# Altium PCB PCB_HidroExtra_v1.0.PcbDoc
Units mil, origin at the board's own origin, x right, y up, seen from the top; angles counter-clockwise.
Board outline 3149.61 x 3937.01 mil, 2 copper layers (Top Layer, Bottom Layer); 78 components, 48 nets, 219 pads, 14 vias.
Unrouted connection lines stored in the file: 1.
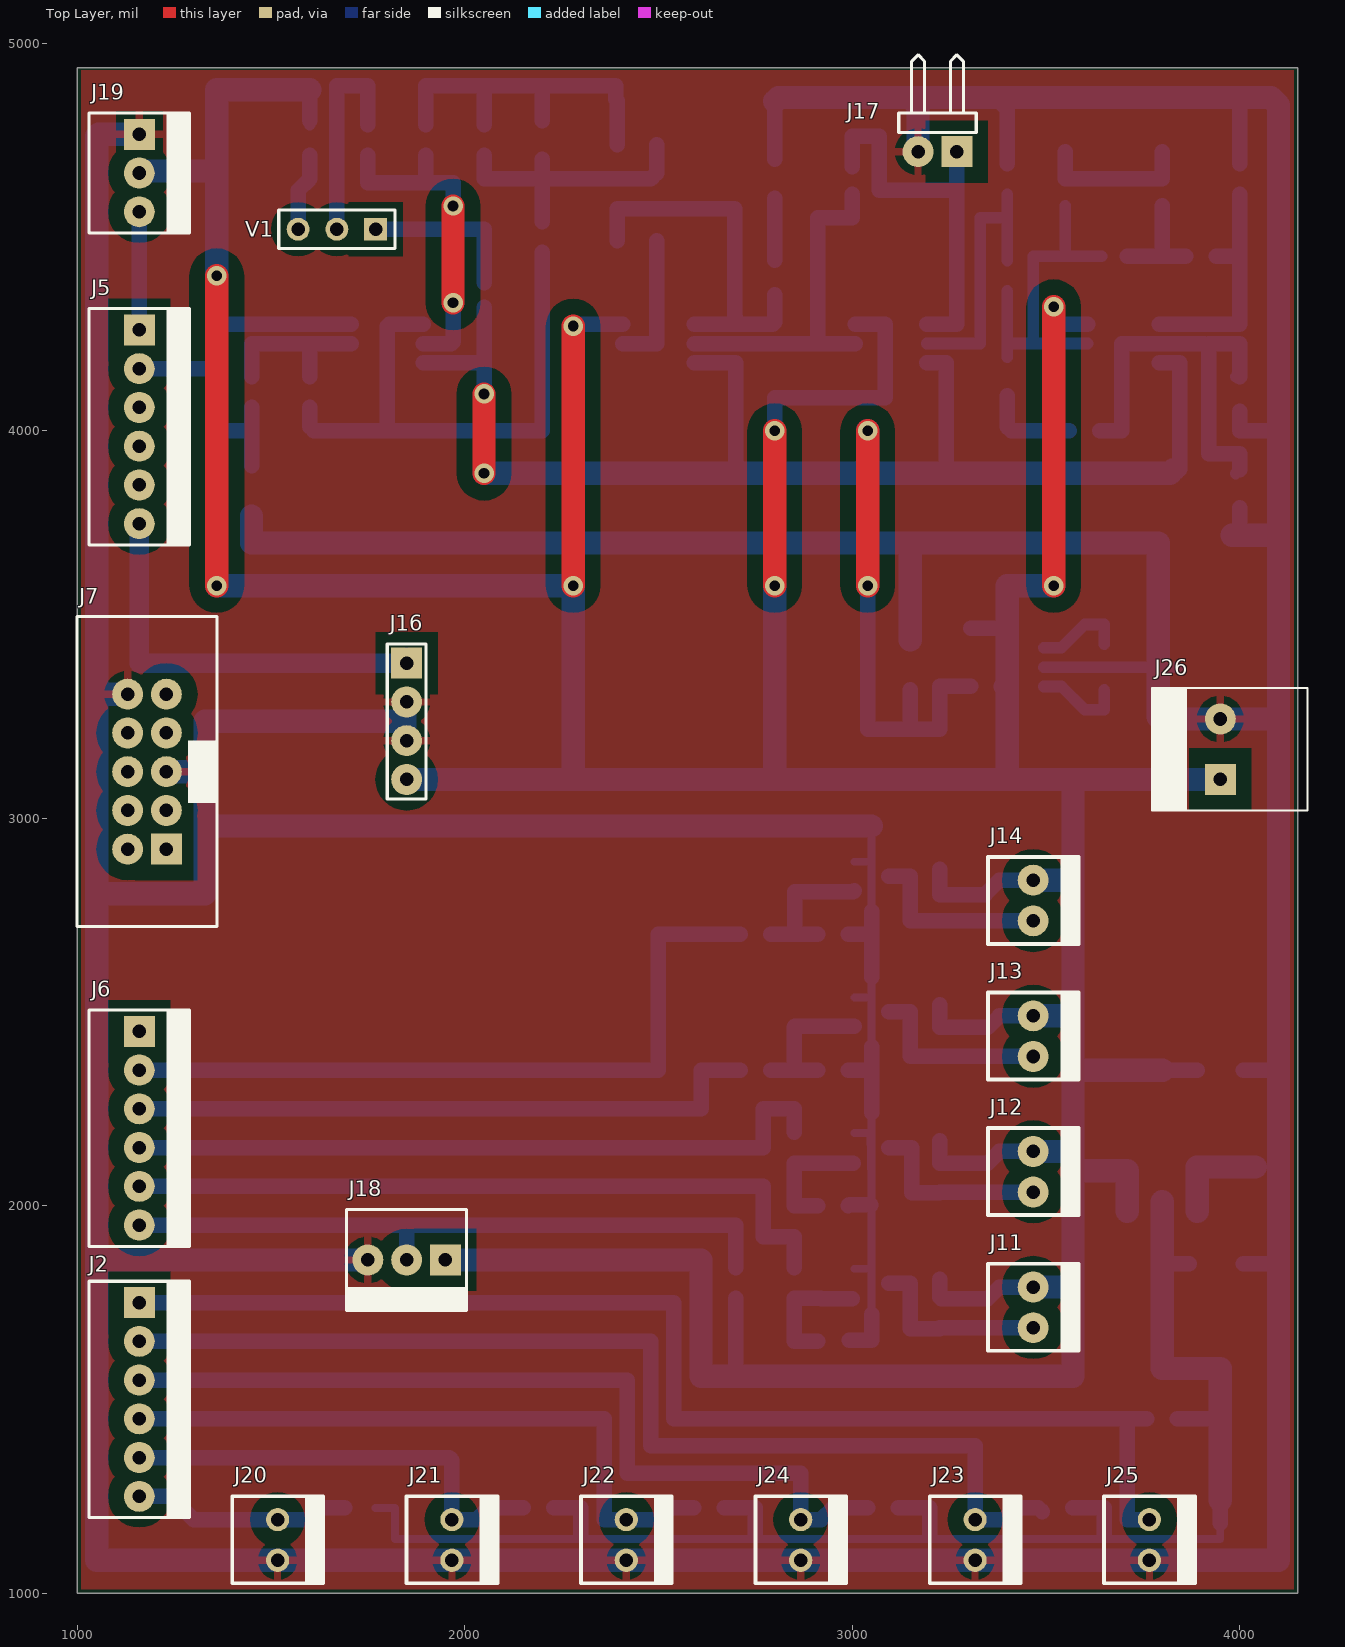
[diagram p0: Top Layer view]
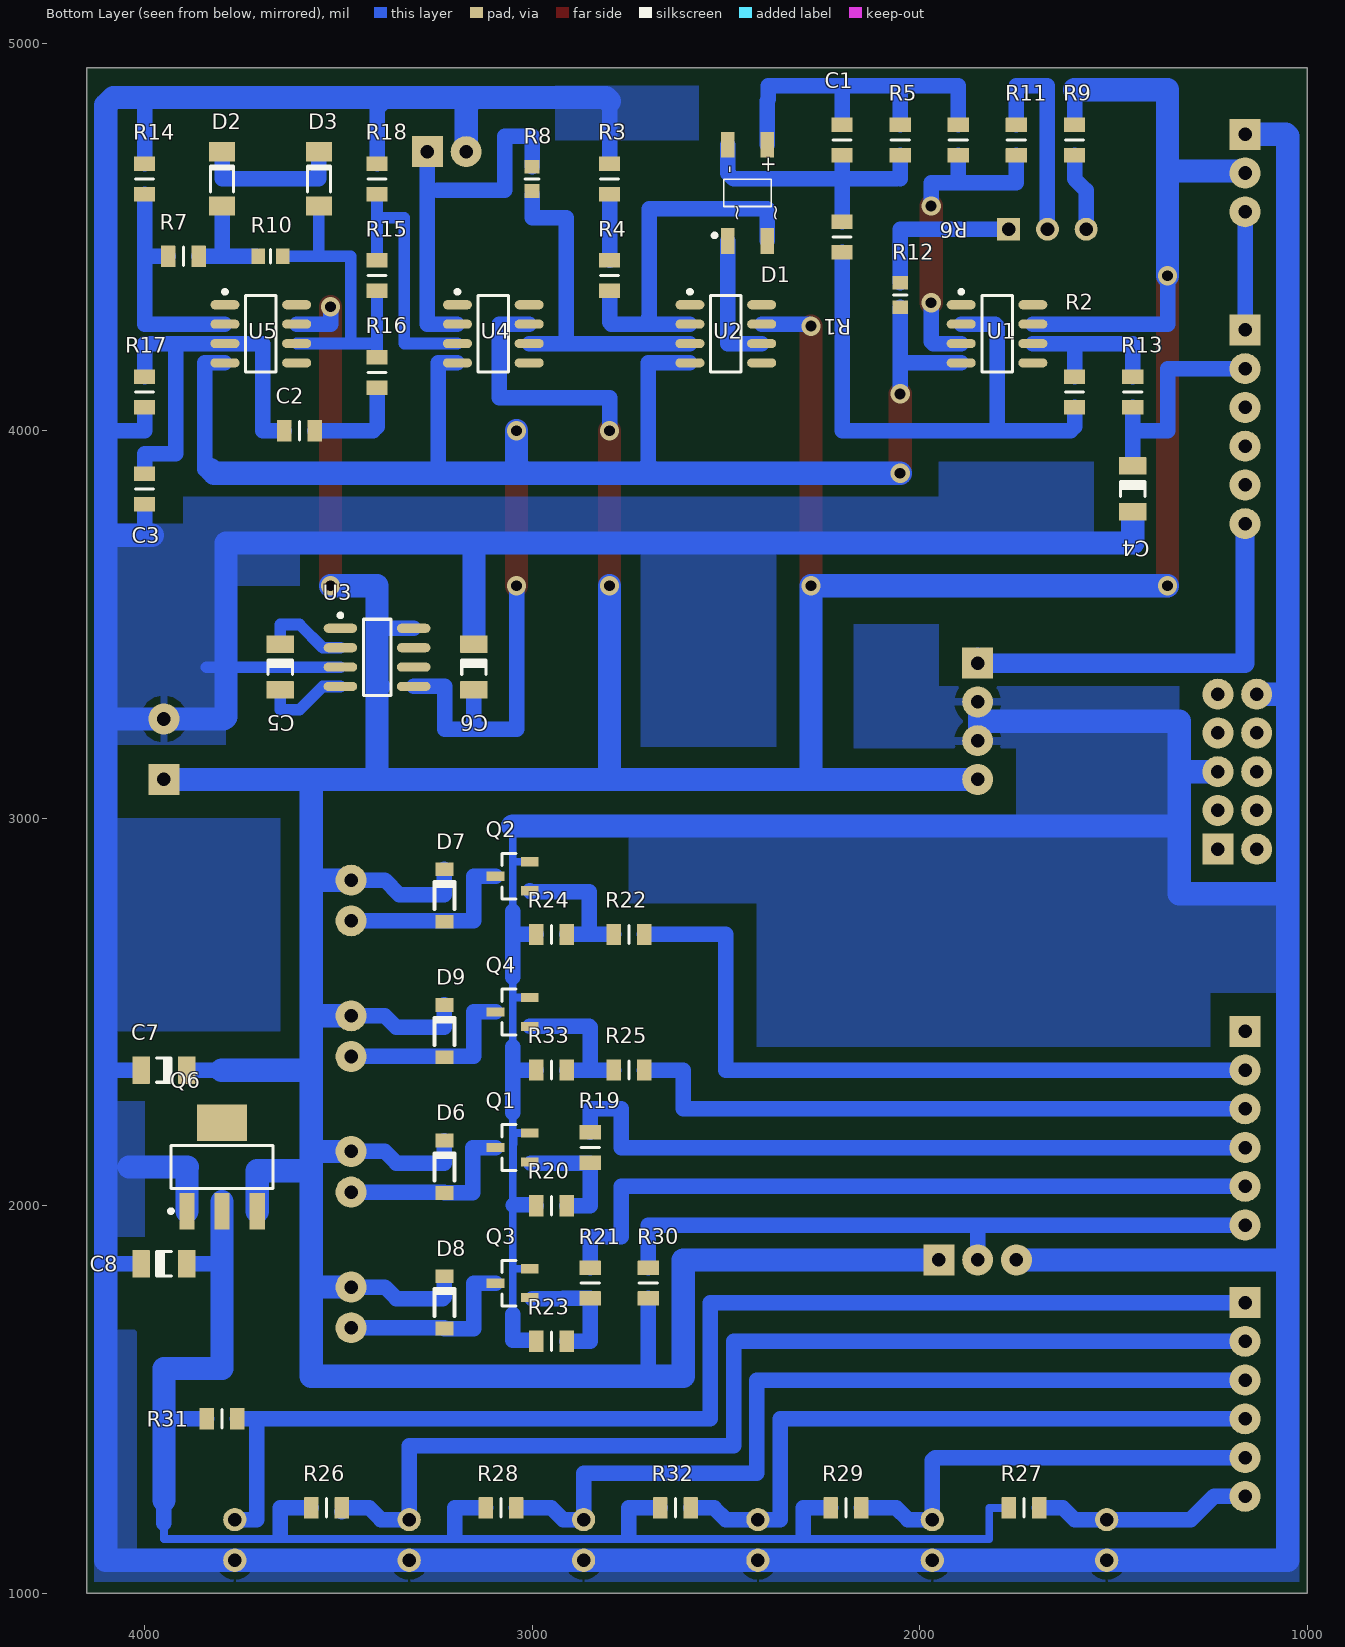
[diagram p1: Bottom Layer view, seen from below]
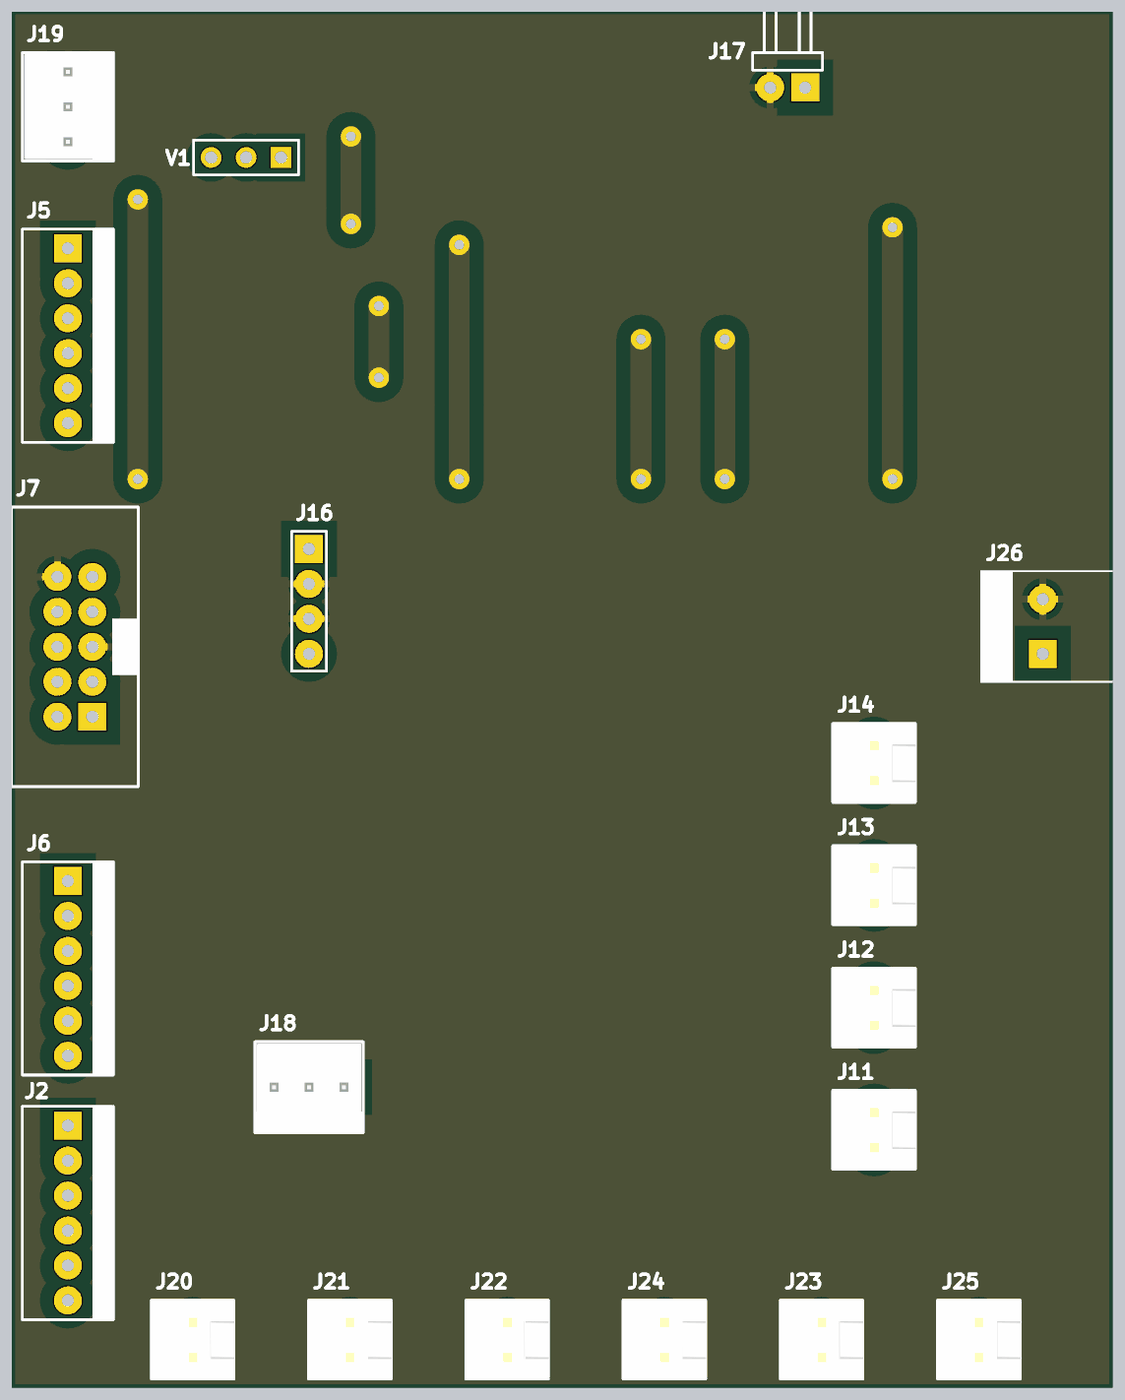
[diagram p2: 3D render of the assembled board from above, using the file's embedded part models]

## Layer stack, top to bottom
Top Solder: solder mask 0.4, Solder Resist, Dk 3.5
Top Layer: signal copper 1.4
Dielectric 1: dielectric 12.6, FR-4, Dk 4.8
Bottom Layer: signal copper 1.4
Bottom Solder: solder mask 0.4, Solder Resist, Dk 3.5

## Board outline
1000,1000 1000,4937.01 4149.61,4937.01 4149.61,1000

## Design rules (kind name [scope] priority, off if disabled: settings)
Clearance TopPoligonoClerance [InNamedPolygon('Top Layer-GND')] p1: gap=40 ignorepadtopadclearanceinfootprint=FALSE
Clearance [All] p2: gap=10 ignorepadtopadclearanceinfootprint=FALSE except(0: Arc-Hole Track-Hole SMDPad-Hole THPad-Hole Via-Hole Fill-Hole Poly-Hole Region-Hole Text-Hole)
PlaneClearance [All] p1: clearance=40
PlaneConnect [All] p1: planeconnectstyle=Relief reliefexpansion=20 reliefentries=4 reliefconductorwidth=10 reliefairgap=20
PolygonConnect [All] p1: thpad.connectstyle=Relief thpad.reliefconductorwidth=20 thpad.reliefentries=4 thpad.polygonreliefangle="90 Angle" thpad.airgapwidth=20 smdpad.connectstyle=Relief smdpad.reliefconductorwidth=10 smdpad.reliefentries=4 smdpad.polygonreliefangle="90 Angle" smdpad.airgapwidth=20 via.connectstyle=Relief via.reliefconductorwidth=10 via.reliefentries=4 via.polygonreliefangle="90 Angle" via.airgapwidth=20
RoutingVias [All] p1: holewidth=28 width=50 viastyle="Through Hole" minholewidth=28 minwidth=50 maxholewidth=28 maxwidth=50
SolderMaskExpansion [All] p1: expansion=4
Width [All] p1: maxlimit=80 minlimit=10 preferedwidth=30
28 further rules are at their usual default settings.

## Classes and differential pairs
component class pump: D6 D7 D8 D9 Q1 Q2 Q3 Q4 R19 R20 R21 R22 R23 R24 R25 R33
component class connectors: C7 C8 J2 J5 J6 J7 J11 J12 J13 J14 J16 J17 J18 J19 J20 J21 J22 J23 J24 J25 J26 Q6 R26 R27 R28 R29 R30 R31 R32
component class adc: C1 C2 C3 C4 C5 C6 D1 D2 D3 R1 R2 R3 R4 R5 R6 R7 R8 R9 R10 R11 R12 R13 R14 R15 R16 R17 R18 U1 U2 U3 U4 U5 V1

## Components (designator, comment, footprint, x,y, rotation, side; value= is the part's Value field where it differs from the comment)
C1 "0.22uF" 0805 2200,4750 r90 bottom
C2 "10nF" 0805 3600,4000 r180 bottom
C3 "Cap" 0805 4000,3850 r270 bottom value=10nF
C4 "Cap" CAPC3216x130N 1450,3850 r270 bottom value=10uF
C5 "10uF" CAPC3216x130N 3650,3390 r270 bottom
C6 "10uF" CAPC3216x130N 3150,3390 r270 bottom
C7 "10uF" CAPC3216x130N 3950,2350 r0 bottom
C8 "10uF" CAPC3216x130N 3950,1850 r180 bottom
D1 "Bridge" BRIDGE_TO-269AA 2444,4614 r90 bottom
D2 "BZV55-C3V3" SOD80C 3800,4650 r90 bottom
D3 "BZV55-C3V3" SOD80C 3550,4650 r90 bottom
D6 "" SOD123 3252,2100 r90 bottom
D7 "" SOD123 3252,2800 r90 bottom
D8 "" SOD123 3252,1750 r90 bottom
D9 "" SOD123 3252,2450 r90 bottom
J2 "Entrada Digitales" MOLEX6 1160,1750 r270 top
J5 "Entradas Analógicas" MOLEX6 1160,4260 r270 top
J6 "Entrdas Digitales" MOLEX6 1160,2450 r270 top
J7 "Conector 5x2" CONN_5x2_BOX 1180,3120 r90 top
J11 "Pump 1" MOLEX2#1 3350,1850 r270 top
J12 "Pump 2" MOLEX2#1 3350,2200 r270 top
J13 "Pump 3" MOLEX2#1 3350,2550 r270 top
J14 "Pump 4" MOLEX2#1 3350,2900 r270 top
J16 "Sensor de PH" HDR1X4 1850,3400 r270 top
J17 "Sonda EC" HDR1X2H 3270,4720 r180 top
J18 "DHT11" MOLEX3 1950,1860 r180 top
J19 "LM35" MOLEX3 1160,4765 r270 top
J20 "Nivel 1" MOLEX2#2 1400,1250 r270 top
J21 "Nivel 1.2" MOLEX2#2 1850,1250 r270 top
J22 "Nivel 2" MOLEX2#2 2300,1250 r270 top
J23 "Nivel 3" MOLEX2#2 3200,1250 r270 top
J24 "Nivel 4" MOLEX2#2 2750,1250 r270 top
J25 "Nivel 5" MOLEX2#2 3650,1250 r270 top
J26 "Fuente" CON_2_156 3950,3100 r90 top
Q1 "BSS138" SOT23_N_123 3050,2150 r0 bottom value="6 Ohm Rdson"
Q2 "BSS138" SOT23_N_123 3050,2850 r0 bottom value="6 Ohm Rdson"
Q3 "BSS138" SOT23_N_123 3050,1800 r0 bottom value="6 Ohm Rdson"
Q4 "BSS138" SOT23_N_123 3050,2500 r0 bottom value="6 Ohm Rdson"
Q6 "LD1117" SOT223_N 3800,2100 r90 bottom
R1 "220K" 0805 2200,4500 r270 bottom
R2 "220K" 0805 1600,4100 r90 bottom
R3 "2.2K" 0805 2800,4650 r270 bottom
R4 "1.0K" 0805 2800,4400 r270 bottom
R5 "22K" 0805 2050,4750 r270 bottom
R6 "220K" 0805 1900,4750 r270 bottom
R7 "33K" 0805 3900,4450 r180 bottom
R8 "6.8K" 0603 3000,4650 r270 bottom
R9 "100K" 0805 1600,4750 r90 bottom
R10 "56K" 0603 3675,4450 r180 bottom
R11 "100K" 0805 1750,4750 r270 bottom
R12 "82K" 0603 2050,4350 r90 bottom
R13 "4.7K" 0805 1450,4100 r90 bottom
R14 "33K" 0805 4000,4650 r270 bottom
R15 "100K" 0805 3400,4400 r90 bottom
R16 "1.0K" 0805 3400,4150 r90 bottom
R17 "1.0K" 0805 4000,4100 r270 bottom
R18 "1.0K" 0805 3400,4650 r90 bottom
R19 "100" 0805 2850,2150 r270 bottom
R20 "10K" 0805 2950,2000 r180 bottom
R21 "100" 0805 2850,1800 r270 bottom
R22 "100" 0805 2750,2700 r0 bottom
R23 "10K" 0805 2950,1650 r180 bottom
R24 "10K" 0805 2950,2700 r180 bottom
R25 "100" 0805 2750,2350 r0 bottom
R26 "10K" 0805 3530,1220 r0 bottom
R27 "10K" 0805 1730,1220 r0 bottom
R28 "10K" 0805 3080,1220 r0 bottom
R29 "10K" 0805 2190,1220 r0 bottom
R30 "10K" 0805 2700,1800 r270 bottom
R31 "10K" 0805 3800,1450 r0 bottom
R32 "10K" 0805 2630,1220 r0 bottom
R33 "10K" 0805 2950,2350 r180 bottom
U1 "TL071" SO8_L 1800,4250 r180 bottom
U2 "TL071" SO8_L 2500,4250 r180 bottom
U3 "ICL7660" SO8_N 3400,3415 r180 bottom
U4 "TL071" SO8_L 3100,4250 r180 bottom
U5 "TL071" SO8_L 3700,4250 r180 bottom
V1 "22K" HDR1X3 1770,4520 r180 top

## Footprints (in the part's own frame and the unit in brackets; to place one, negate y for a bottom-side part, rotate by r counter-clockwise, add the part's x,y. Pads: shape width x height; smd on the part's side, far side on the other; paste and mask are expansions set on the pad)
0603 [mm]
  rrect5% 0.9x1 smd mask+0.051: 1(-0.8,0) 2(0.8,0)
  silkscreen extent 0,-0.45 0,0.45, body extent -0.85,-0.48 0.85,0.48, height 0.25
0805 [mm]
  rrect5% 0.95x1.4 smd: 1(-1,0) 2(1,0)
  silkscreen extent 0,-0.6 0,0.6, body extent -1.07,-0.7 1.07,0.7, height 0.6
BRIDGE_TO-269AA [mil]
  rect 66.93x35.43 smd: 1(124,-51) 2(-124,-51) 3(124,51) 4(-124,51)
  silkscreen extent -115,-61 35,90, body extent -139,-97 139,97, height 106
CAPC3216x130N [mm] "Chip Capacitor, Body 3.2x1.6mm, IPC Medium Density"
  rrect5% 1.15x1.8 smd: 1(-1.5,0) 2(1.5,0)
  silkscreen extent -0.48,-0.8 0.5,0.8, body extent -1.7,-0.9 1.7,0.9, height 1.3
CON_2_156 [mil] "Connector, 0.156\", 2 vias"
  rect 80x80 hole 35: 1(0,0)
  round 80 hole 35: 2(156,0)
  silkscreen extent -80,-225 236,177
CONN_5x2_BOX [mil] "Connector; IDC, Straight Press-in Pin, Thru-Hole; 10 Position; Vertical; Pitch 2.54 mm; Body 20.32 x 9.2 x 9.45 mm (LxWxH)"
  rect 80x80 hole 35: 1(-200,-50)
  round 80 hole 35: 2(-200,50) 3(-100,-50) 4(-100,50) 5(0,-50) 6(0,50) 7(100,-50) 8(100,50) 9(200,-50) 10(200,50)
  silkscreen extent -400,-181 400,181
HDR1X2H [mil] "Connector; Header; 2 Position; Right Angle"
  rect 80x80 hole 35: 1(0,0)
  round 80 hole 35: 2(100,0)
  silkscreen extent -50,-250 150,-50
HDR1X3 [mm] "Connector; Header; 3 Position"
  rect 1.5x1.5 hole 0.9: 1(0,0)
  round 1.5 hole 0.9: 2(2.54,0) 3(5.08,0)
  silkscreen extent -1.27,-1.27 6.35,1.27
HDR1X4 [mil] "Connector; Header; 4 Position"
  rect 80x80 hole 35: 1(0,0)
  round 80 hole 35: 2(100,0) 3(200,0) 4(300,0)
  silkscreen extent -50,-50 350,50
MOLEX2#1 [mil]
  round 80 hole 35: 1(60,117) 2(165,117)
  silkscreen extent 0,0 224,234, body extent 0,0 226,236, height 465
MOLEX2#2 [mil]
  round 60 hole 35: 1(60,117) 2(165,117)
  silkscreen extent 0,0 224,234, body extent 0,0 226,236, height 465
MOLEX3 [mil]
  rect 80x80 hole 35: 1(0,0)
  round 80 hole 35: 2(100,0) 3(200,0)
  silkscreen extent -55,-130 255,130, body extent -50,-125 250,125, height 423
MOLEX6 [mil]
  rect 80x80 hole 35: 1(0,0)
  round 80 hole 35: 2(100,0) 3(200,0) 4(300,0) 5(400,0) 6(500,0)
  silkscreen extent -55,-130 555,130
SO8_L [mm] "SOIC, 8-Leads, Body 4.9x3.9mm, Pitch 1.27mm, IPC High Density"
  oval 1.9x0.6 smd: 1(-2.35,1.905) 2(-2.35,0.635) 3(-2.35,-0.635) 4(-2.35,-1.905) 5(2.35,-1.905) 6(2.35,-0.635) 7(2.35,0.635) 8(2.35,1.905)
  silkscreen extent -2.48,-2.5 1,2.88, body extent -2,-2.5 2,2.5, height 1.75
SO8_N [mm] "SOIC, 8-Leads, Body 4.9x3.9mm, Pitch 1.27mm, IPC Medium Density"
  oval 2.2x0.6 smd: 1(-2.4,1.905) 2(-2.4,0.635) 3(-2.4,-0.635) 4(-2.4,-1.905) 5(2.4,-1.905) 6(2.4,-0.635) 7(2.4,0.635) 8(2.4,1.905)
  silkscreen extent -2.53,-2.5 0.9,2.88, body extent -2,-2.5 2,2.5, height 1.75
SOD80C [mm] "Metal Electrode Face (MELF) Diode; Body 3.5 x 1.6 mm (LxDia)"
  rect 1.25x1.7 smd: 1(-1.775,0) 2(1.775,0)
  silkscreen extent -0.85,-0.75 0.85,0.75
SOD123 [mil]
  rect 35.43x47.24 smd: 1(-67,-26) 2(68,-26)
  silkscreen extent -35,-52 35,0, body extent -73,-57 73,5, height 50
SOT23_N_123 [mm] "SOT23, 3-Leads, Body 2.9x1.3mm, Pitch 0.95mm, Lead Span 2.3mm - Reverse Pinning, IPC Medium Density"
  rect 1.15x0.6 smd: 1(-1.125,0.95) 2(-1.125,-0.95) 3(1.125,0)
  silkscreen extent -0.2,-1.5 0.7,1.5, body extent -0.7,-1.5 0.7,1.5, height 1.1
SOT223_N [mm] "SOT223, 4-Leads, Body 6.5x3.5mm, Pitch 2.3mm, Lead Span 7mm, IPC Medium Density"
  rect 2.4x1 smd: 1(-2.9,2.3) 2(-2.9,0) 3(-2.9,-2.3)
  rect 2.4x3.3 smd: 4(2.9,0)
  silkscreen extent -3.02,-3.35 1.4,3.48, body extent -1.85,-3.35 1.85,3.35, height 1.7

## Part data
C1: library part Cap, "Cap", Package=0603, Tolerance=±10%, Voltage-Rated=50V
C2: library part Cap, "Cap", Package=0805, Tolerance=±10%, Voltage-Rated=50V
C3: Package=0805, Tolerance=±10%, Voltage-Rated=50V
C4: Package=0603, Tolerance=±10%, Voltage-Rated=50V
C5 C6: library part "Cap Pol", "Cap", Current="90 mARMS", Manufacturer=Panasonic, MfgPartNum=EEE-FC1H220P, Package="8mm dia.", Tolerance=±10%, Voltage-Rated=50V, 3rdMfgr="Vishay / MAL214097103E3"
C7 C8: library part Cap, "Cap", Package=0603, Tolerance=±10%, Voltage-Rated=6.3V
D1: "Full Wave Diode Bridge", DatasheetVersion=E2732B, LatestRevisionDate=29-May-2009, LatestRevisionNote="Sch pins A & K swapped.", PackageDescription="Bridge Rectifier; 4 Terminals; Body 9.4 x 9.4 mm (typ); Pitch 5.08 mm", PackageReference=D-38, Published=8-Jun-2000, Publisher="Altium Limited"
D2 D3: library part "D Zener", "Zener Diode 3.3v - SMD", LatestRevisionDate=17-Jul-2002, LatestRevisionNote="Re-released for DXP Platform.", PackageDescription="Diode, Thru-Hole; 2 Leads; 0.7 in Pin Spacing", PackageReference=DIODE-0.7, Published=8-Jun-2000, Publisher="Altium Limited"
D6 D7 D8 D9: library part MBRX160, "SOD123"
J2 J5 J6: library part MOLEX6
J11 J12 J13 J14 J20 J21 J22 J23 J24 J25 J26: library part "Header 2", "Header, 2-Pin", LatestRevisionDate=17-Jul-2002, LatestRevisionNote="Re-released for DXP Platform.", Publisher="Altium Limited"
J16: library part "Header 4", LatestRevisionDate=17-Jul-2002, LatestRevisionNote="Re-released for DXP Platform.", Publisher="Altium Limited"
J17: library part "Header 2H", "Header, 2-Pin, Right Angle", LatestRevisionDate=17-Jul-2002, LatestRevisionNote="Re-released for DXP Platform.", Publisher="Altium Limited"
J18 J19: library part MOLEX3
Q1 Q2 Q3 Q4: "N-Channel MOSFET", Manufacturer=Fairchild, Package=SOT23, Voltage-Rated=50V
Q6: "Voltage Reg., Low Drop", PackageDescription="3-Pin Transistor Outline Package 2.54 mm Pitch, 15.1 mm Lead Span", PackageReference=SOT-223
R1 R2 R3 R4 R5 R6 R7 R8 R9 R10 R11 R12 R13 R14 R15 R16 R17 R18 R19 R20 R21 R22 R23 R24 R25 R26 R27 R28 R29 R30 R31 R32 R33: library part Res, "Resistor", Package=0603, Tolerance=1%
U1 U2 U4 U5: "Low-noise jfet-input operational amplifiers"
U3: "CMOS Voltage Converters, from positive to negative for an input range of +1.5V to +10.0V"
V1: library part Preset, "Potentiometer", LatestRevisionDate=17-Jul-2002, LatestRevisionNote="Re-released for DXP Platform.", PackageDescription="Variable Resistor, Thru-Hole; 3 Leads", PackageReference=VR5, Published=8-Jun-2000, Publisher="Altium Limited", Set Position=0.5, Sim Note="Enter the Resistance value and the set point into parameter fields."

## Via types
v1: diameter 50, hole 28, Top Layer to Bottom Layer, 14 vias

## Nets (pads, with @x,y where several pads share a name; then routed paths per layer and width w, separated by ;. In a path a pad name is that pad's centre, name@x,y a point inside that pad or via, vN(x,y) a via of type N, cw(c..) or ccw(c..) an arc to the next point about the centre after c; other vN are vias at no path point)
+3.3v: C8.2 Q6.2 R26.2 R27.2 R28.2 R29.2 R31.2 R32.2 | length 4053.8
  Bottom Layer w20: R27.2 1820,1220 1820,1140 3950,1140 3950,1180
  Bottom Layer w40: R29.2 2300,1220 2300,1150 ; R32.2 2750,1220 2750,1150 ; R28.2 3200,1220 3200,1150 ; R26.2 3650,1220 3650,1150 ; 3800,1850 C8.2@3870,1850 ; R31.2 3950,1450 ; 3950,1180 3950,1240
  Bottom Layer w60: Q6.2@3800,2010 Q6.2 3800,1850 3800,1580 3950,1580 3950,1450 3950,1240
+5v: C7.1 D6.2 D7.2 D8.2 D9.2 J11.1 J12.1 J13.1 J14.1 J16.4 J18.1 J19.2 J26.1 Q6.3 R9.2 R30.2 U1.7 U2.7 U3.8 U4.7 U5.7 | length 15495.7
  Top Layer w60: v1(1360,3600) v1(1360,4400) ; v1(2280,3600) v1(2280,4270) ; v1(2800,3600) v1(2800,4000) ; v1(3520,3600) v1(3520,4320)
  Bottom Layer w30: R9.2 R9.2@1600,4790 ; v1(2280,4270) v1@2285,4275
  Bottom Layer w40: v1(1360,4400) 1360,4275 U1.7 ; R9.2@1600,4800 1600,4880 ; v1@2285,4275 U2.7 ; 2700,1590 R30.2 ; v1(2800,4000) 2800,4085 3085,4085 3085,4275 U4.7 ; D8.2@3226,1810 3226,1764 3230,1760 3350,1760 3380,1790 J11.1 ; D6.2 3226,2110 3350,2110 3380,2140 J12.1 ; D9.2 3226,2460 3350,2460 3380,2490 J13.1 ; D7.2 3226,2803 3343,2803 3380,2840 J14.1 ; U3.8 3400,3490 ; v1(3520,4320) 3520,4275 U5.7 ; 3570,2350 3570.55,2349.45 ; 3800.55,2349.45 3890.39,2349.45 C7.1
  Bottom Layer w50: 2800,3111.77 2805,3106.77 ; 3390,3340 3400,3330
  Bottom Layer w60: J19.2 1165,4670 1360,4670 ; v1(1360,3600) v1(2280,3600) 2280,3110 2290,3100 ; v1(1360,4400) 1360,4670 ; 1600,4880 1360,4880 1360,4670 ; J16.4@1870,3100 2290,3100 ; J18.1 2610,1860 2610,1560 3570,1560 3570,1790 ; 2800,3111.77 v1(2800,3600) ; 3400,3100 2290,3100 ; 3400,3130 3400,3330 ; 3400,3340 3400,3490 3400,3600 v1(3520,3600) ; 3410,3100 3570,3100 ; J11.1 3570,1790 ; J12.1 3570,2140 ; J13.1 3570,2490 ; J14.1 3570,2840 ; 3570.55,2349.45 3800.55,2349.45 ; Q6.3 3709.45,2090 3570,2090 ; J26.1 3570,3100 ; 3570,1790 3570,2090 ; 3570,2090 3570,2140 ; 3570,2140 3570,2350 3570,2490 ; 3570,2490 3570,2840 ; 3570,2840 3570,3100
-5v: C6.2 R12.1 U1.4 U2.4 U3.5 U4.4 U5.4 | length 4792
  Top Layer w60: v1(2050,3890) v1(2050,4095) ; v1(3040,3600) v1(3040,4000)
  Bottom Layer w40: U1.4 2045,4175 2050,4180 ; v1@2050,4100 2050,4180 ; R12.1 2050,4180 ; U2.4 2700,4175 2700,3900 2700,3890 ; v1(3040,3600) 3040,3230 3150,3230 ; C6.2 3150,3230 ; U4.4 3242.57,4175 3242.57,3890 ; U3.5 3225.51,3340 3225.51,3230 3150,3230 ; U5.4 3845,4175 3845,3900 3830,3900
  Bottom Layer w60: v1(2050,3890) 2690,3890 2700,3900 ; 2700,3890 3242.57,3890 3820,3890 3830,3900 ; 3030,3900 3040,3910 v1(3040,4000)
GND: C3.2 C4.2 C6.1 C7.2 C8.1 J7.5 J7.10 J16.2 J16.3 J17.2 J18.3 J19.1 J20.2 J21.2 J22.2 J23.2 J24.2 J25.2 J26.2 Q1.2 Q2.2 Q3.2 Q4.2 Q6.1 R3.1 R14.1 R17.2 R18.2 R20.1 R23.1 R24.1 R33.1 U3.3 | length 22883.2
  Bottom Layer w20: Q3.2 3047.4,1837.4 3050,1840 ; Q1.2 3047.4,2187.4 3050,2060 ; Q4.2 3047.4,2537.4 3050,2540 ; Q2.2 3047.4,2887.4 3050,2890 ; 3050,1720 3050,1840 ; 3050,2240 3050,2060 ; 3050,2410 3050,2540 ; 3050,2590 3050,2540 ; 3050,2760 3050,2890 ; 3050,2980 3050,2890 ; 3050,1840 3050,1890 3050,2060
  Bottom Layer w30: U3.3 3790,3390 3840,3390
  Bottom Layer w40: 1050,3325 1055,3320 ; R3.1@2800,4700 2800,4850 ; R20.1 2991.97,2002.6 3047.4,2002.6 3048.35,2001.65 ; R33.1 3048.35,2350 ; R24.1 3040,2700 ; R23.1@2991.97,1652.6 3050,1652.6 3050,1720 ; 3050,2240 3050,2410 ; 3050,2590 3050,2760 ; 3370,4860 3400,4830 R18.2 ; 3980,3730 4000,3750 C3.2@4000,3800.63 ; R17.2@4000,4050.63 4000,4000 4100,4000 ; R14.1 4000,4830 ; C8.1 4089.37,1850 ; C7.2 4100,2350
  Bottom Layer w50: 1830,3250 J16.2 J16.3 ; 4079.37,3730 4089.37,3740
  Bottom Layer w60: 1055,3320 J7.10 ; 1060,1855 1060,1860 J18.3 ; J19.1 1055,4765 1050,4760 1050,4665 1050,3325 1050,2805 ; J7.5 1330,3120 ; C4.2@1450,3780 1450,3710 3160,3710 ; 1830,3250 1330,3250 1330,3120 ; 2800,4850 2810,4860 3370,4860 4080,4860 4100,4840 4100,4200 4100,4000 4100,3750.63 4100,2350 4100,1085 J25.2 J23.2 J24.2 J22.2 J21.2 J20.2 1050,1085 1050,2805 ; 3050,2980 1330,2980 ; C6.1@3150,3460 3150,3700 3160,3710 ; 3160,4850 3170,4840 J17.2 ; Q6.1 3890.55,2099.45 3890,2100 4040,2100 ; 3980,3730 4079.37,3730 ; 4085.37,3256 J26.2 3796,3256 3790,3262 3790,3390 3790,3710 3160,3710 ; 1050,2805 1330,2805 1330,2980 ; 1330,2980 1330,3120
NetC1_1: C1.1 D1.3 R1.1 R5.2 | length 735.5
  Bottom Layer w40: 2050,4650 R5.2 ; 2060,4650 2200,4650 ; R1.1 2200,4650 ; C1.1@2200,4700 2200,4650 ; D1.3 2495,4665 2480,4650 2200,4650
NetC1_2: C1.2 D1.1 R5.1 R6.1 | length 914.5
  Bottom Layer w40: R6.1 1900,4890 2140,4890 2390,4890 2390,4855 2393,4852 D1.1 ; R5.1 2050,4880 ; C1.2@2200,4800 2200,4880
NetC2_1: C2.1 C3.1 R17.1 U5.3 | length 1095.2
  Bottom Layer w30: C3.1@3990,3889.37 C3.1@4000,3899.37 ; R17.1@3990,4139.37 R17.1@4000,4149.37
  Bottom Layer w40: C2.1 3695.32,4000 3695.32,4225 U5.3 3910,4225 ; C3.1@4000,3899.37 4000,3940 3920,3940 3920,4225 4000,4225 4000,4149.37 R17.1
NetC2_2: C2.2 R16.1 | length 244.8
  Bottom Layer w40: 3400,4090 3400,4010 3410,4000 C2.2
NetC4_1: C4.1 J5.2 R13.1 | length 672.2
  Bottom Layer w40: J5.2 1360,4160 1360,4000 1450,4000 ; C4.1 1450,4000 ; 1450,3990 1450,4000 ; 1450,4000 R13.1 1450,4000
NetC5_1: C5.1 U3.2 | length 231.3
  Bottom Layer w30: U3.2 3540,3440 3600,3500 3650,3500 C5.1
NetC5_2: C5.2 U3.4 | length 231.3
  Bottom Layer w30: U3.4 3540,3340 3600,3280 3650,3280 C5.2
NetD1_2: D1.2 R4.2 U2.2 | length 959.4
  Bottom Layer w40: D1.2 2393,4573 2697,4573 2697,4293 2700,4290 2700,4275 ; U2.2 2700,4275 ; 2795,4275 2700,4275 ; 2800,4280 R4.2@2800,4350.63
NetD1_4: D1.4 U2.6 | length 352.5
  Bottom Layer w40: U2.6 2495,4225 D1.4
NetD2_1: D2.1 R7.2 R10.1 | length 311.4
  Bottom Layer w30: 3830,4450 R7.2
  Bottom Layer w40: R10.1@3710,4450 R7.2 ; 3800,4450 D2.1
NetD2_2: D2.2 D3.2 | length 389.8
  Bottom Layer w40: D3.2 3550,4650 3800,4650 D2.2
NetD3_1: D3.1 R10.2 R15.1 R16.2 U5.6 | length 911.1
  Bottom Layer w30: R16.2 3400,4230 ; R15.1 3400,4230 ; 3467.5,4230 3467.5,4450 3540,4450 ; D3.1 3550,4460 3540,4450 ; U5.6 3405,4225 3400,4230 ; R10.2 3540,4450
NetD6_1: D6.1 J12.2 Q1.3 | length 489.7
  Bottom Layer w40: Q1.3 3153,2150 3153,2033 D6.1 ; D6.1@3226,2035 J12.2
NetD7_1: D7.1 J14.2 Q2.3 | length 487.7
  Bottom Layer w40: Q2.3 3150,2850 3150,2735 J14.2
NetD8_1: D8.1 J11.2 Q3.3 | length 489.7
  Bottom Layer w40: Q3.3 3150,1800 3150,1683 D8.1 ; D8.1@3226,1685 J11.2
NetD9_1: D9.1 J13.2 Q4.3 | length 487.7
  Bottom Layer w40: Q4.3 3150,2500 3150,2385 J13.2
NetJ2_1: J2.1 J25.1 R31.1 | length 3217.6
  Bottom Layer w40: J2.1 2540,1750 2540,1450 3710,1450 ; R31.1 3710,1450 ; J25.1 3710,1190 3710,1450
NetJ2_2: J2.2 J23.1 R26.1 | length 2807.2
  Bottom Layer w40: J2.2 2480,1650 2480,1380 3317,1380 J23.1 3390,1190 3420,1220 3480.63,1220 R26.1@3490.63,1210
NetJ2_3: J2.3 J24.1 R28.1 | length 2253.1
  Bottom Layer w40: J2.3 2420,1550 2420,1310 2867,1310 J24.1 2920,1190 2950,1220 R28.1
NetJ2_4: J2.4 J22.1 R32.1 | length 1703.1
  Bottom Layer w40: J2.4 2360,1450 2360,1190 J22.1 2500,1190 2530,1220 R32.1
NetJ2_5: J2.5 J21.1 R29.1 | length 1159
  Bottom Layer w40: J2.5 1960,1350 1967,1343 J21.1 2030,1190 2060,1220 R29.1
NetJ2_6: J2.6 J20.1 R27.1 | length 567.9
  Bottom Layer w40: J2.6 1240,1250 1300,1190 J20.1 1600,1190 1630,1220 R27.1
NetJ5_1: J5.1 J19.3 | length 305
  Bottom Layer w40: J5.1 J19.3
NetJ5_6: J5.6 J16.1 | length 1058.3
  Bottom Layer w40: J16.1@1830,3400 J16.1@1850,3420
  Bottom Layer w50: J5.6 1160,3400 J16.1@1830,3400
NetJ6_2: J6.2 R22.1 | length 1900.6
  Bottom Layer w40: J6.2 2500,2350 2500,2700 R22.1
NetJ6_3: J6.3 R25.1 | length 1650.6
  Bottom Layer w40: J6.3 2610,2250 2610,2350 R25.1
NetJ6_4: J6.4 R19.1 | length 1850.6
  Bottom Layer w40: J6.4 2770,2150 2770,2250 2850,2250 R19.1
NetJ6_5: J6.5 R21.1 | length 1900.6
  Bottom Layer w40: J6.5 2770,2050 2770,1920 2850,1920 R21.1
NetJ6_6: J6.6 J18.2 R30.1 | length 1740.6
  Bottom Layer w40: J6.6 1850,1950 ; J18.2 1850,1950 ; R30.1 2700,1950 1850,1950
NetJ17_1: J17.1 R8.1 U4.2 | length 986
  Bottom Layer w40: R8.1 3000,4760 3070,4760 3070,4620 3245,4620 ; U4.2 3270,4275 J17.1
NetQ1_1: Q1.1 R19.2 R20.2 | length 323.7
  Bottom Layer w40: R20.2 2850,2000 2850,2110 Q1.1@3003.11,2110
NetQ2_1: Q2.1 R22.2 R24.2 | length 386.9
  Bottom Layer w40: R22.2 2850,2700 ; R24.2 2850,2700 ; Q2.1 3003.11,2810 2851.97,2810 2851.97,2701.97 2850,2700
NetQ3_1: Q3.1 R21.2 R23.2 | length 321.5
  Bottom Layer w40: R23.2 2850,1650 R21.2 2919.37,1760.63 2920,1760 Q3.1@3000,1760
NetQ4_1: Q4.1 R25.2 R33.2 | length 388.4
  Bottom Layer w40: R25.2 2850,2350 ; R33.2 2850,2350 ; Q4.1 2851.97,2462.6 2850,2460.63 2850,2350
NetR1_2: R1.2 R2.1 U1.2 | length 1484.1
  Bottom Layer w30: 1600,4010 1610,4000 ; 1800,4270 1805,4275
  Bottom Layer w40: 1600,4010 R2.1 ; 1610,4000 1790,4000 ; 1800,4270 1800,4010 1790,4000 ; 1805,4275 U1.2 ; R1.2 2200,4000 1790,4000
NetR2_2: R2.2 R13.2 U1.6 | length 428.7
  Bottom Layer w40: R13.2 1450,4225 1600,4225 ; R2.2 1600,4225 ; U1.6 1600,4225
NetR3_2: R3.2 R4.1 | length 160.6
  Bottom Layer w40: R4.1 R3.2@2800,4600
NetR6_2: R6.2 R11.2 U1.3 | length 850.8
  Top Layer w60: v1(1970,4330) v1(1970,4580)
  Bottom Layer w40: R11.2 1750,4640 1900,4640 ; U1.3 1965,4225 1970,4230 v1(1970,4330) ; R6.2 1900,4640 ; v1(1970,4580) 1970,4640 1900,4640
NetR7_1: R7.1 R14.2 U5.2 | length 603.7
  Bottom Layer w40: U5.2 4000,4275 4000,4450 ; R7.1 4000,4450 ; R14.2 4000,4450
NetR8_2: R8.2 U2.3 U4.6 | length 889.1
  Bottom Layer w30: 2910,4225 2911.5,4226.5
  Bottom Layer w40: U2.3 2910,4225 U4.6 ; 2911.5,4226.5 2911.5,4550 3000,4550 R8.2@3000,4610
NetR9_1: R9.1 V1.3 | length 203.1
  Bottom Layer w40: V1.3 1570,4620 1600,4650 R9.1
NetR11_1: R11.1 V1.2 | length 550.6
  Bottom Layer w40: V1.2 1670,4890 1750,4890 R11.1
NetR12_2: R12.2 V1.1 | length 418.5
  Bottom Layer w40: V1.1 2050,4520 R12.2
NetR15_2: R15.2 R18.1 U4.3 | length 703.7
  Bottom Layer w30: U4.3 3330,4225 3330,4550 3400,4550 ; R15.2 3400,4550 ; R18.1 3400,4550
pads on no net: J5.3 J5.4 J5.5 J6.1 J7.1 J7.2 J7.3 J7.4 J7.6 J7.7 J7.8 J7.9 Q6.4 U1.1 U1.5 U1.8 U2.1 U2.5 U2.8 U3.1 U3.6 U3.7 U4.1 U4.5 U4.8 U5.1 U5.5 U5.8

## Polygon pours and split planes (outlines as drawn)
GND on Top Layer "Top Layer-GND" (solid, pour order 34): 4140,4930 4140,1010 1010,1010 1010,4930
GND on Top Layer "Top Layer-GND 1" (solid, pour order 30): 3820,3200
GND on Bottom Layer "Bottom Layer-GND" (solid, pour order 49): 1940,3730 1940,3830 3900,3830 3900,3730
GND on Bottom Layer "Bottom Layer-GND 4" (solid, pour order 41): 3790,3600 3790,3190 4100,3190 4100,3760 3800,3760 3600,3760 3600,3600
GND on Bottom Layer "Bottom Layer-GND 5" (solid, pour order 47): 1050,2540 1060,2550 1250,2550 1250,2410 2420,2410 2420,2780 2750,2780 2750,2990 1750,2990 1750,3180 2140,3180 2170,3180 2170,3500 1950,3500 1950,3340 1330,3340 1330,3250 1320.41,2780 1050,2780
GND on Bottom Layer "Bottom Layer-GND 2" (solid, pour order 36): 2570,4890 2570,4750 2590,4750 2940,4750 2940,4890
GND on Bottom Layer "Bottom Layer-GND 1" (solid, pour order 32): 1550,3710 1550,3920 1950,3920 1950,3710
GND on Bottom Layer "Bottom Layer-GND 9" (solid, pour order 10): 4130,1089.94 4130,1030 1020,1030 1020,1084.98
GND on Bottom Layer "Bottom Layer-GND 8" (solid, pour order 6): 4100,1680 4025,1680 4020,1675 4020,1085 4095,1085 4110,1100 4110,1120
GND on Bottom Layer "Bottom Layer-GND 7" (solid, pour order 8): 4100,2270 4000,2270 4000,1920 4100,1920
GND on Bottom Layer "Bottom Layer-GND 6" (solid, pour order 4): 4100,3000 3650,3000 3650,2450 4100,2450
GND on Bottom Layer "Bottom Layer-GND 3" (solid, remove dead copper, pour order 0): 2370,3715 2370,3185 2720,3185 2720,3715

## Silkscreen, mask and mechanical layers (free items; w line width, h text height)
Mechanical 1:
  lines w10: 1000,1000 1000,4937.01 4149.61,4937.01 4149.61,1000

## Text inside footprints (layer, text, board x,y; h text height)
D1: Bottom Overlay "~" at 2454,4539 h39.37 r270; Bottom Overlay "~" at 2354,4539 h39.37 r270; Bottom Overlay "-" at 2474,4664 h39.37 r270; Bottom Overlay "+" at 2374,4664 h39.37 r270